# EAGLE board 5v-oscillator (EAGLE 5.07)
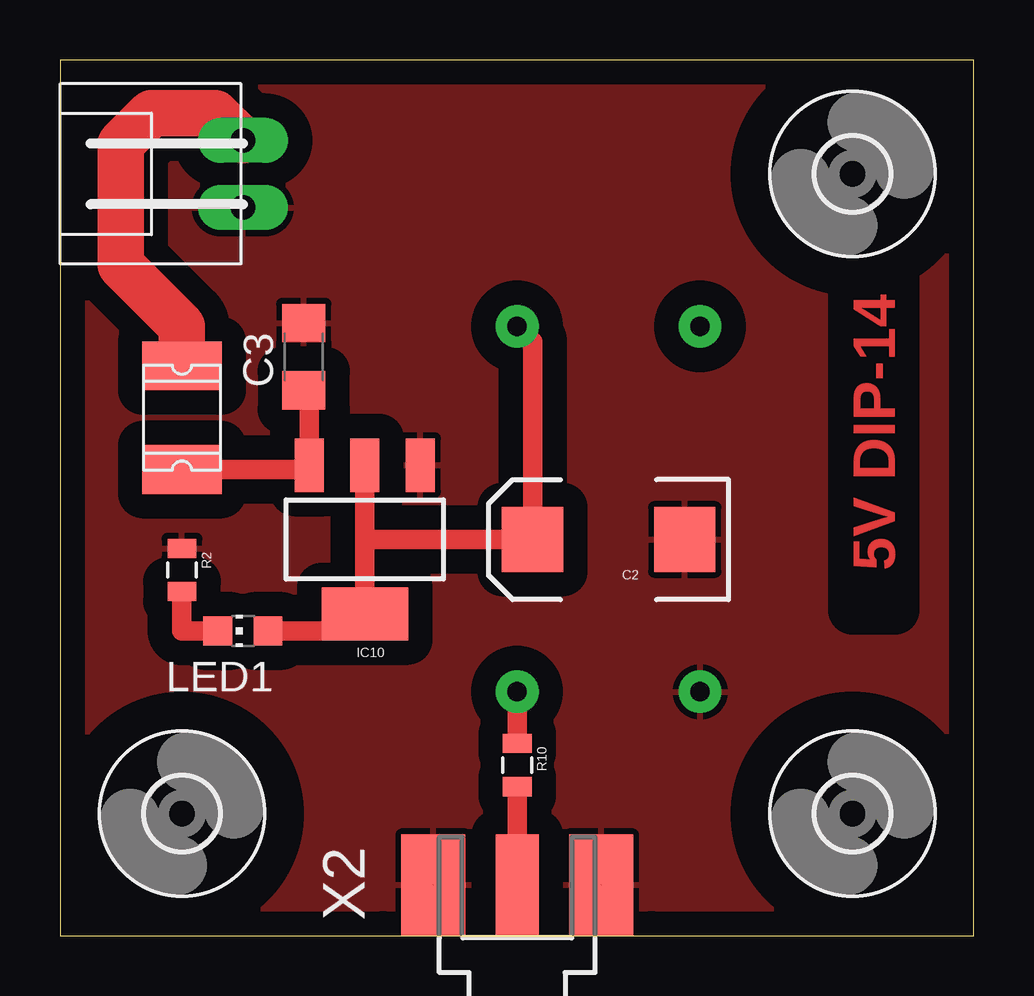
[diagram p0: board, top side]
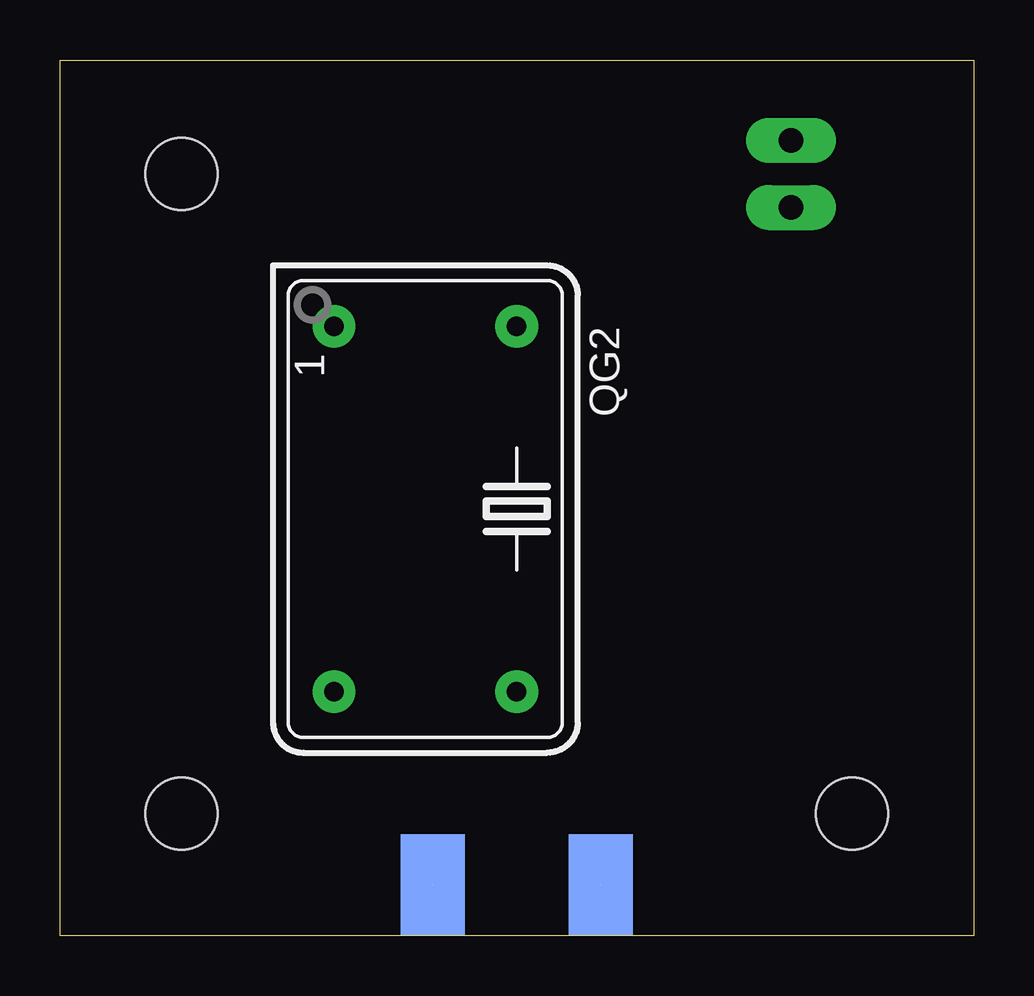
[diagram p1: board, bottom side, seen from below]

Size 38.08 x 36.5 mm. Coordinates in mm from the lower left corner, seen from the top.
Outline: 0,0 38.08,0 38.08,36.5 0,36.5 0,0
Copper layers (1*16): Top 0.035mm / dielectric 1.5mm / Bottom 0.035mm
Design rules "default": minimum track width 10mil, minimum drill 24mil, track to track 8mil, track to pad 8mil, pad to pad 8mil, via to via 8mil, smd to smd 8mil, copper to edge 40mil, drill to drill 8mil, minimum pad ring 10mil, minimum via ring 8mil, stop-mask expansion 4mil, vias tented up to drill 0mil, thermal gap 10mil

## Footprints (pad centres in the part's own frame; a part is rotated, then mirrored left to right if it is on the bottom)
EIA7343 = smd 2.55 x 2.7: A 3.17,0; C -3.17,0
C1206 = smd 1.6 x 1.8: 1 -1.4,0; 2 1.4,0
3,0 = hole 3: 0,0
SOT223 = smd 1.219 x 2.235: 1 -2.311,-3.099; 2 0,-3.099; 3 2.311,-3.099 | smd 3.6 x 2.2: 4 0,3.099
XH-1X2-LONG-LOCK = drill 1.016 pad 1.88 long: 1 1.397,0; 2 -1.397,0
CHIP-LED0805 = smd 1.2 x 1.2: A 0,-1.05; C 0,1.05
1812L = smd 2.03 x 3.3: P$1 -2.16,0; P$2 2.16,0
DIL14S = drill 0.813 pad 1.778 round: 1 -7.62,-3.81; 7 7.62,-3.81; 8 7.62,3.81; 14 -7.62,3.81
0805 = smd 0.8 x 1.2: 1 -0.9,0; 2 0.9,0
SMA-KE = smd 4.191 x 1.778: 1 2.115,0 | smd 4.191 x 2.667: G@1 2.115,3.495; G@2 2.115,-3.495 | smd 4.191 x 2.667 bottom: G@3 2.115,3.495; G@4 2.115,-3.495

## Placement (x,y rotation side)
C2  10uf  [EIA7343]  22.86,16.51 180 top
C3  [C1206]  10.16,24.13 90 top
H1  MOUNT-HOLE3.0  [3,0]  5.08,5.08 0 top
H2  MOUNT-HOLE3.0  [3,0]  33.02,5.08 0 top
H3  MOUNT-HOLE3.0  [3,0]  33.02,31.75 0 top
IC10  1117-5V  [SOT223]  12.7,16.51 180 top
JP7  EXT  [XH-1X2-LONG-LOCK]  7.62,31.75 90 top
LED1  RED  [CHIP-LED0805]  7.62,12.7 90 top
PTC  500mA  [1812L]  5.08,21.59 270 top
QG2  1M/50M  [DIL14S]  22.86,17.78 270 bottom
R2  400R  [0805]  5.08,15.24 270 top
R10  33  [0805]  19.05,7.11 270 top
X2  SMA--KE  [SMA-KE]  19.05,0 90 top

## Library data of the parts
C2 C3 JP7 PTC QG2 R2 R10 = digital-toy
H1-H3 = holes
IC10 = SparkFun
LED1 = led
X2 = dtoy-RF

## Nets
CLK-REF: QG2.8 R10.1
GND: C2.C C3.2 IC10.1 JP7.2 QG2.7 R2.1 X2.G@1 X2.G@2 X2.G@3 X2.G@4
N$4: JP7.1 PTC.P$1
N$14: C3.1 IC10.3 PTC.P$2
N$19: R10.2 X2.1
N$32: LED1.C R2.2
VCC: C2.A IC10.2 IC10.4 LED1.A QG2.14

## Tracks (layer width: path | path; a pad name or v marks a point on that pad's centre or on a via)
CLK-REF
  Top 0.813: R10.1 QG2.8
GND  (2 unrouted)
  pour Top (isolate 1.016): -5.08,44.45 34.29,44.45 48.26,30.48 48.26,1.27 44.45,-2.54 -6.35,-2.54 -7.62,-1.27 -7.62,41.91
N$4
  Top 1.93: PTC.P$1 5.08,25.4 2.54,27.94 2.54,33.02 3.81,34.29 6.48,34.29 JP7.1
N$14
  Top 0.61: 10.21,19.43 IC10.3 | 10.39,22.5 C3.1
  Top 0.813: PTC.P$2 10.21,19.43 | IC10.3 10.39,22.5
N$19
  Top 0.813: X2.1 R10.2
N$32
  Top 0.813: LED1.C 5.08,12.7 R2.2
VCC
  Top 0.61: 12.7,12.7 IC10.4
  Top 0.813: QG2.14 19.69,24.76 C2.A 12.7,16.51 | IC10.4 12.7,16.51 | 12.7,16.51 IC10.2 | LED1.A 12.7,12.7

## Text on the board
Top: 5V DIP-14